# Altium PCB pcb.pcbdoc (part 4 of 6)
Units mm, origin at the board's own origin, x right, y up, seen from the top; angles counter-clockwise.
Board outline 95 x 60 mm, 4 copper layers (Top Layer, TopInt Layer, BotInt Layer, Bottom Layer), stack 1.459 mm thick; 162 components, 164 nets, 673 pads, 269 vias.
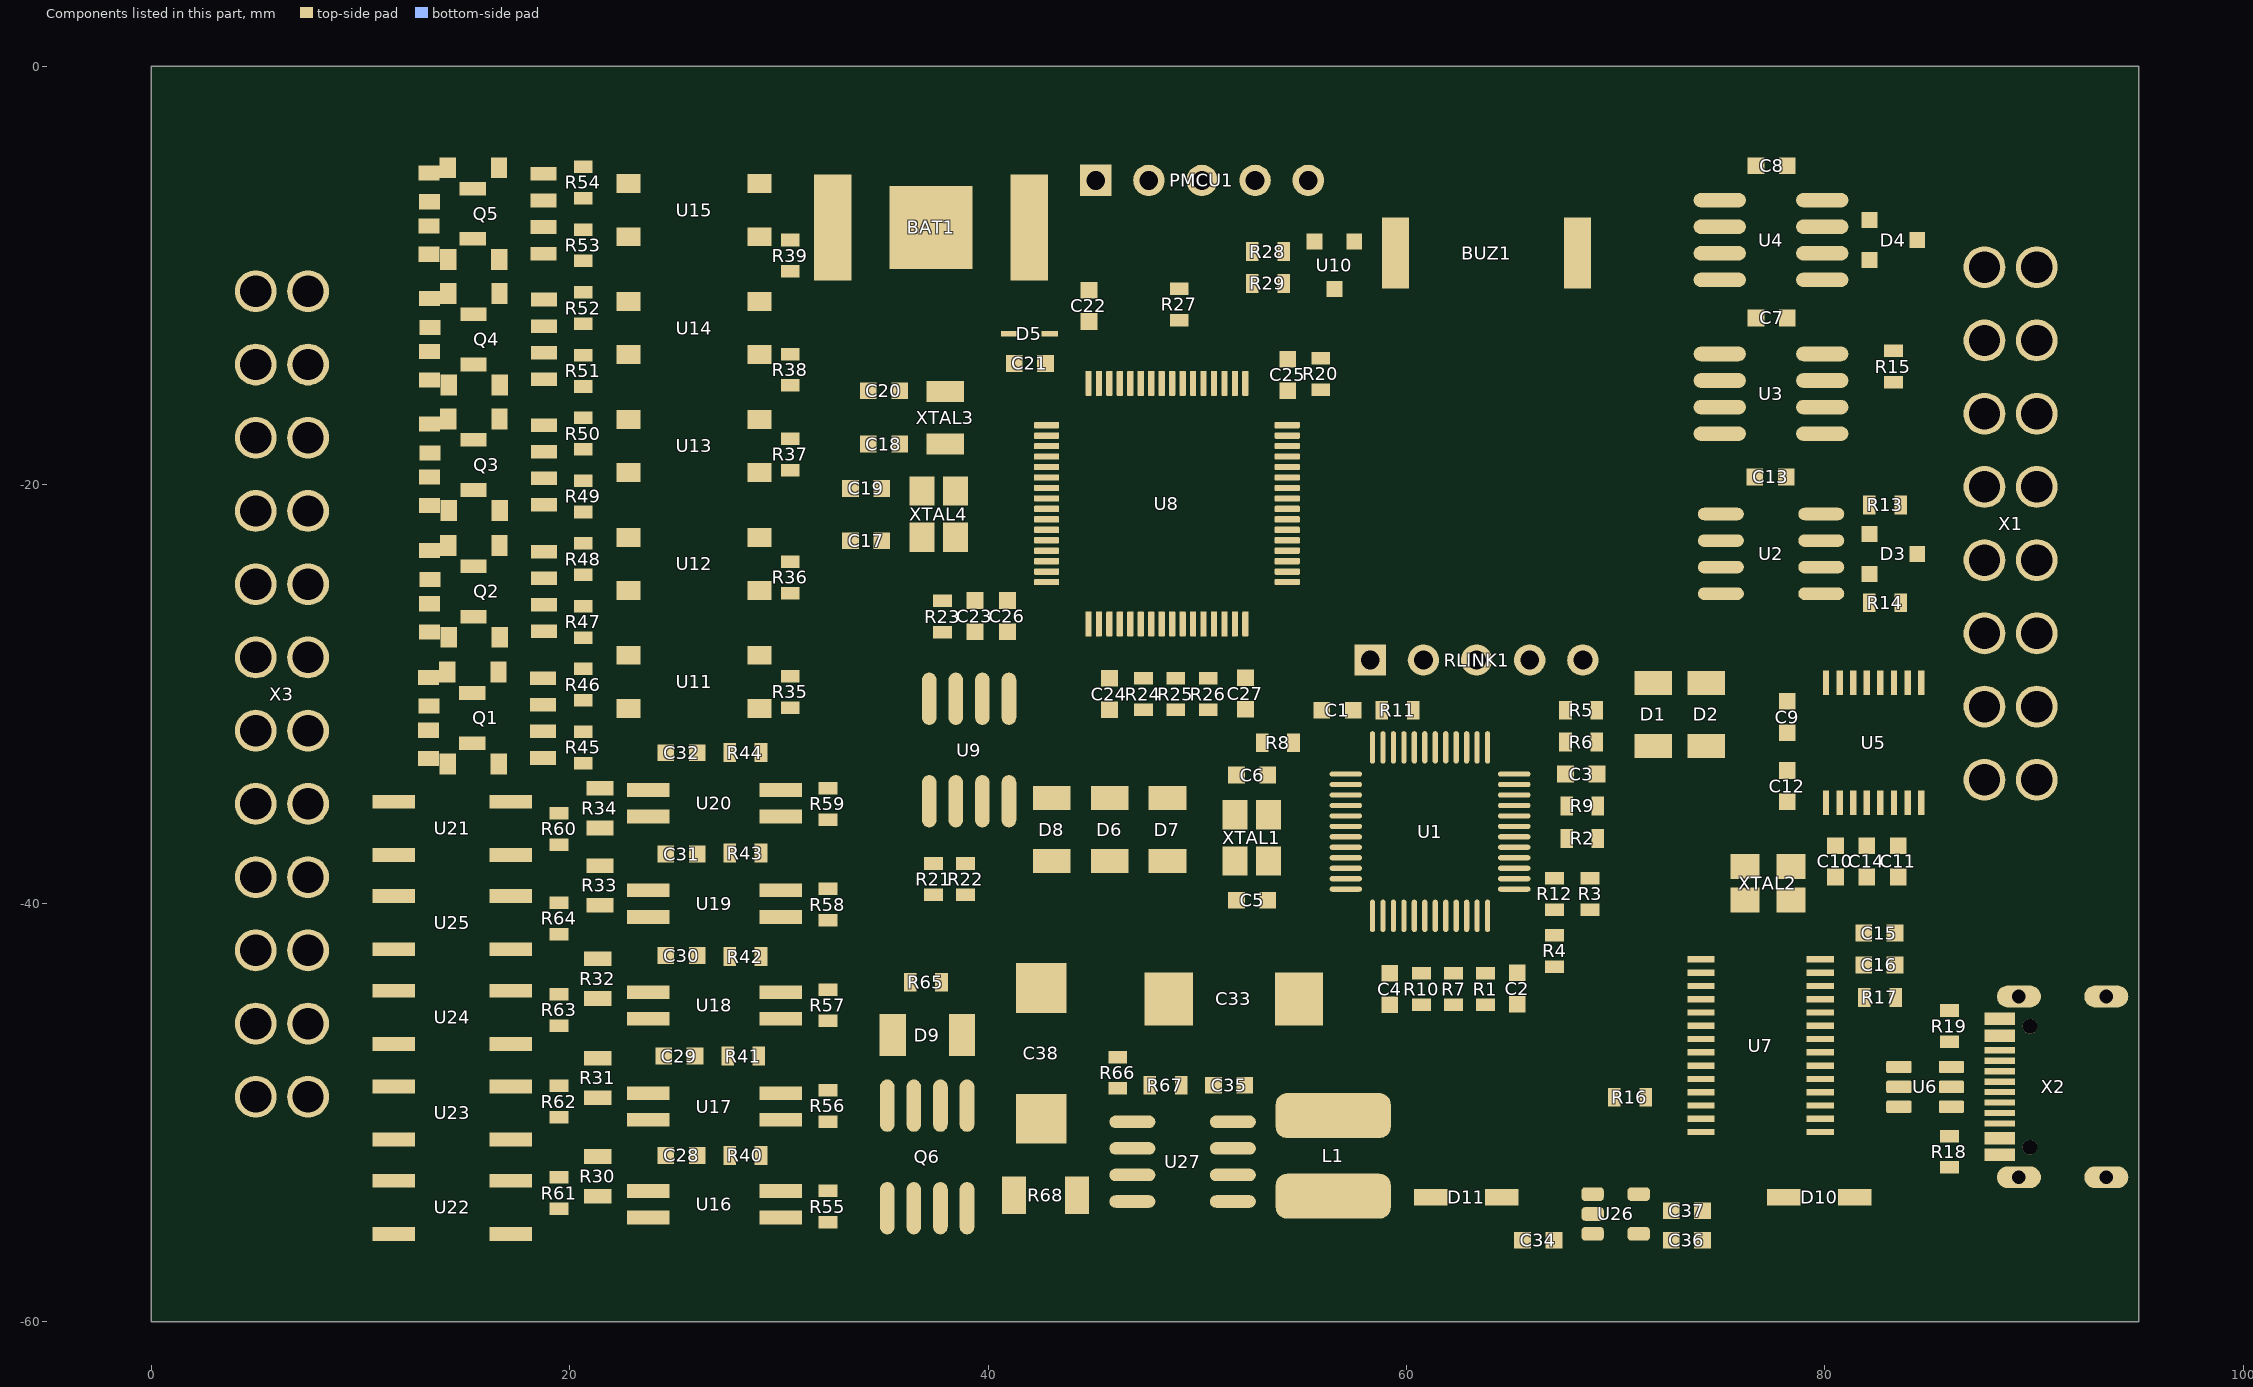
[diagram p6: the components of this part, seen from the top]

## Via types
v1: diameter 0.7, hole 0.3, Top Layer to Bottom Layer, tented both sides, 249 vias
v2: diameter 1, hole 0.5, Top Layer to Bottom Layer, tented both sides, 20 vias

## Nets (pads, with @x,y where several pads share a name; then routed paths per layer and width w, separated by ;. In a path a pad name is that pad's centre, name@x,y a point inside that pad or via, vN(x,y) a via of type N, cw(c..) or ccw(c..) an arc to the next point about the centre after c; other vN are vias at no path point) (continued)
copper on no net: (continued)
  Top Layer w0.025: 68.334,-20.15 68.512,-20.15 ; 68.334,-19.642 68.512,-19.642 ; 68.334,-19.617 68.512,-19.617 ; 68.334,-19.592 68.538,-19.592 ; 68.334,-18.245 68.639,-18.245 ; 68.334,-18.22 68.639,-18.22 ; 68.334,-18.195 68.487,-18.195 ; 68.36,-20.252 68.563,-20.252 ; 68.36,-20.227 68.538,-20.227 ; 68.36,-19.566 68.538,-19.566 ; 68.36,-19.541 68.563,-19.541 ; 68.36,-19.515 68.563,-19.515 ; 68.36,-18.322 68.614,-18.322 ; 68.36,-18.296 68.639,-18.296 ; 68.36,-18.271 68.639,-18.271 ; 68.385,-20.303 68.614,-20.303 ; 68.385,-20.277 68.588,-20.277 ; 68.385,-19.49 68.588,-19.49 ; 68.385,-18.398 68.588,-18.398 ; 68.385,-18.372 68.614,-18.372 ; 68.385,-18.347 68.614,-18.347 ; 68.411,-20.328 68.639,-20.328 ; 68.411,-19.465 68.614,-19.465 ; 68.411,-19.439 68.639,-19.439 ; 68.411,-18.474 68.588,-18.474 ; 68.411,-18.449 68.588,-18.449 ; 68.411,-18.423 68.588,-18.423 ; 68.436,-20.354 68.665,-20.354 ; 68.436,-19.414 68.69,-19.414 ; 68.461,-20.404 68.792,-20.404 ; 68.461,-20.379 68.715,-20.379 ; 68.461,-19.388 68.741,-19.388 ; 68.487,-19.363 68.817,-19.363 ; 68.512,-20.43 69.249,-20.43 ; 68.512,-19.338 69.249,-19.338 ; 68.512,-18.195 68.665,-18.195 ; 68.512,-18.169 68.665,-18.169 ; 68.512,-18.144 68.665,-18.144 ; 68.512,-18.118 68.69,-18.118 ; 68.538,-20.455 69.223,-20.455 ; 68.538,-19.312 69.223,-19.312 ; 68.538,-18.093 68.69,-18.093 ; 68.538,-18.068 68.69,-18.068 ; 68.538,-18.042 68.715,-18.042 ; 68.563,-20.481 69.198,-20.481 ; 68.563,-18.017 68.715,-18.017 ; 68.563,-17.991 68.715,-17.991 ; 68.563,-17.966 68.715,-17.966 ; 68.563,-17.941 68.741,-17.941 ; 68.588,-19.287 69.173,-19.287 ; 68.588,-17.915 68.741,-17.915 ; 68.588,-17.89 68.741,-17.89 ; 68.588,-17.864 68.766,-17.864 ; 68.588,-17.839 68.766,-17.839 ; 68.614,-20.506 69.147,-20.506 ; 68.614,-17.814 68.766,-17.814 ; 68.614,-17.788 68.766,-17.788 ; 68.614,-17.763 68.792,-17.763 ; 68.614,-17.737 68.792,-17.737 ; 68.639,-19.261 69.122,-19.261 ; 68.639,-17.712 68.792,-17.712 ; 68.639,-17.687 68.817,-17.687 ; 68.639,-17.661 68.817,-17.661 ; 68.665,-20.531 69.096,-20.531 ; 68.665,-17.636 68.817,-17.636 ; 68.665,-17.61 68.817,-17.61 ; 68.665,-17.585 68.842,-17.585 ; 68.665,-17.56 68.842,-17.56 ; 68.69,-19.236 69.071,-19.236 ; 68.69,-17.534 68.842,-17.534 ; 68.69,-17.509 68.868,-17.509 ; 68.69,-17.483 68.868,-17.483 ; 68.69,-17.458 68.868,-17.458 ; 68.69,-15.782 68.868,-15.782 ; 68.69,-15.756 68.868,-15.756 ; 68.69,-15.731 68.868,-15.731 ; 68.69,-15.705 68.868,-15.705 ; 68.69,-15.68 68.868,-15.68 ; 68.69,-15.655 68.868,-15.655 ; 68.69,-15.629 68.868,-15.629 ; 68.69,-15.604 68.868,-15.604 ; 68.69,-15.578 68.868,-15.578 ; 68.69,-15.553 68.868,-15.553 ; 68.69,-15.528 68.868,-15.528 ; 68.69,-15.502 68.868,-15.502 ; 68.69,-15.477 68.868,-15.477 ; 68.69,-15.451 68.868,-15.451 ; 68.69,-15.426 68.868,-15.426 ; 68.69,-15.401 68.868,-15.401 ; 68.715,-17.433 68.893,-17.433 ; 68.715,-17.407 68.893,-17.407 ; 68.715,-17.382 68.893,-17.382 ; 68.715,-17.356 68.893,-17.356 ; 68.715,-15.883 68.893,-15.883 ; 68.715,-15.858 68.893,-15.858 ; 68.715,-15.832 68.893,-15.832 ; 68.715,-15.807 68.868,-15.807 ; 68.715,-15.375 68.893,-15.375 ; 68.715,-15.35 68.893,-15.35 ; 68.715,-15.324 68.893,-15.324 ; 68.715,-15.299 68.919,-15.299 ; 68.741,-17.331 68.919,-17.331 ; 68.741,-17.306 68.919,-17.306 ; 68.741,-17.28 68.919,-17.28 ; 68.741,-15.934 68.919,-15.934 ; 68.741,-15.909 68.919,-15.909 ; 68.741,-15.274 68.919,-15.274 ; 68.741,-15.248 68.944,-15.248 ; 68.766,-20.557 68.969,-20.557 ; 68.766,-17.255 68.944,-17.255 ; 68.766,-17.229 68.944,-17.229 ; 68.766,-17.204 68.944,-17.204 ; 68.766,-15.985 68.969,-15.985 ; 68.766,-15.959 68.944,-15.959 ; 68.766,-15.223 68.944,-15.223 ; 68.766,-15.197 68.969,-15.197 ; 68.792,-16.036 69.02,-16.036 ; 68.792,-16.01 68.995,-16.01 ; 68.792,-15.172 68.995,-15.172 ; 68.792,-15.147 69.02,-15.147 ; 68.817,-16.061 69.046,-16.061 ; 68.817,-15.121 69.046,-15.121 ; 68.842,-16.112 69.147,-16.112 ; 68.842,-16.086 69.096,-16.086 ; 68.842,-15.096 69.096,-15.096 ; 68.868,-16.137 69.604,-16.137 ; 68.868,-15.07 69.173,-15.07 ; 68.893,-15.045 69.604,-15.045 ; 68.919,-16.163 69.579,-16.163 ; 68.919,-15.02 69.579,-15.02 ; 68.944,-19.363 69.274,-19.363 ; 68.944,-16.188 69.554,-16.188 ; 68.944,-14.994 69.554,-14.994 ; 68.969,-20.404 69.274,-20.404 ; 68.995,-16.213 69.503,-16.213 ; 68.995,-14.969 69.503,-14.969 ; 69.02,-19.388 69.3,-19.388 ; 69.046,-20.379 69.3,-20.379 ; 69.046,-16.239 69.427,-16.239 ; 69.046,-14.943 69.452,-14.943 ; 69.071,-19.414 69.325,-19.414 ; 69.096,-20.354 69.325,-20.354 ; 69.122,-20.328 69.35,-20.328 ; 69.122,-19.439 69.35,-19.439 ; 69.122,-18.245 69.325,-18.245 ; 69.122,-18.22 69.3,-18.22 ; 69.122,-18.195 69.3,-18.195 ; 69.122,-18.169 69.3,-18.169 ; 69.122,-18.144 69.3,-18.144 ; 69.122,-18.118 69.3,-18.118 ; 69.122,-18.093 69.3,-18.093 ; 69.122,-18.068 69.3,-18.068 ; 69.122,-18.042 69.3,-18.042 ; 69.147,-20.303 69.376,-20.303 ; 69.147,-19.465 69.35,-19.465 ; 69.147,-18.322 69.401,-18.322 ; 69.147,-18.296 69.376,-18.296 ; 69.147,-18.271 69.35,-18.271 ; 69.147,-18.017 69.325,-18.017 ; 69.147,-17.991 69.35,-17.991 ; 69.147,-17.966 69.376,-17.966 ; 69.147,-17.56 69.325,-17.56 ; 69.147,-17.534 69.325,-17.534 ; 69.147,-17.509 69.325,-17.509 ; 69.147,-17.483 69.325,-17.483 ; 69.173,-20.277 69.376,-20.277 ; 69.173,-19.515 69.376,-19.515 ; 69.173,-19.49 69.376,-19.49 ; 69.173,-18.347 69.452,-18.347 ; 69.173,-17.941 69.401,-17.941 ; 69.173,-17.458 69.35,-17.458 ; 69.173,-17.433 69.376,-17.433 ; 69.173,-17.407 69.401,-17.407 ; 69.173,-16.264 69.325,-16.264 ; 69.198,-20.252 69.401,-20.252 ; 69.198,-20.227 69.401,-20.227 ; 69.198,-19.541 69.401,-19.541 ; 69.198,-18.372 69.935,-18.372 ; 69.198,-17.915 69.452,-17.915 ; 69.198,-17.382 69.427,-17.382 ; 69.198,-14.918 69.3,-14.918 ; 69.223,-20.201 69.401,-20.201 ; 69.223,-19.592 69.427,-19.592 ; 69.223,-19.566 69.401,-19.566 ; 69.223,-18.398 69.909,-18.398 ; 69.223,-17.89 69.528,-17.89 ; 69.223,-17.356 69.452,-17.356 ; 69.249,-20.176 69.427,-20.176 ; 69.249,-20.15 69.427,-20.15 ; 69.249,-20.125 69.427,-20.125 ; 69.249,-19.642 69.427,-19.642 ; 69.249,-19.617 69.427,-19.617 ; 69.249,-18.423 69.884,-18.423 ; 69.249,-17.864 69.655,-17.864 ; 69.249,-17.331 69.528,-17.331 ; 69.274,-20.1 69.452,-20.1 ; 69.274,-20.074 69.452,-20.074 ; 69.274,-20.049 69.452,-20.049 ; 69.274,-20.023 69.452,-20.023 ; 69.274,-19.744 69.452,-19.744 ; 69.274,-19.719 69.452,-19.719 ; 69.274,-19.693 69.452,-19.693 ; 69.274,-19.668 69.452,-19.668 ; 69.274,-18.449 69.833,-18.449 ; 69.274,-17.839 70.138,-17.839 ; 69.274,-17.306 70.036,-17.306 ; 69.3,-19.998 69.452,-19.998 ; 69.3,-19.973 69.452,-19.973 ; 69.3,-19.947 69.452,-19.947 ; 69.3,-19.922 69.452,-19.922 ; 69.3,-19.896 69.452,-19.896 ; 69.3,-19.871 69.452,-19.871 ; 69.3,-19.846 69.452,-19.846 ; 69.3,-19.82 69.452,-19.82 ; 69.3,-19.795 69.452,-19.795 ; 69.3,-19.769 69.452,-19.769 ; 69.3,-17.814 70.138,-17.814 ; 69.3,-17.28 70.011,-17.28 ; 69.325,-18.474 69.782,-18.474 ; 69.325,-17.255 69.985,-17.255 ; 69.325,-15.07 69.63,-15.07 ; 69.35,-17.788 70.138,-17.788 ; 69.35,-16.112 69.63,-16.112 ; 69.376,-18.499 69.706,-18.499 ; 69.376,-17.229 69.935,-17.229 ; 69.401,-16.086 69.655,-16.086 ; 69.401,-15.096 69.655,-15.096 ; 69.427,-17.763 70.138,-17.763 ; 69.427,-17.204 69.884,-17.204 ; 69.452,-16.061 69.681,-16.061 ; 69.452,-15.121 69.681,-15.121 ; 69.477,-16.036 69.706,-16.036 ; 69.477,-15.147 69.681,-15.147 ; 69.503,-16.01 69.706,-16.01 ; 69.503,-15.172 69.706,-15.172 ; 69.528,-17.179 69.782,-17.179 ; 69.528,-15.985 69.731,-15.985 ; 69.528,-15.223 69.731,-15.223 ; 69.528,-15.197 69.706,-15.197 ; 69.554,-17.737 70.138,-17.737 ; 69.554,-15.959 69.731,-15.959 ; 69.554,-15.934 69.731,-15.934 ; 69.554,-15.274 69.731,-15.274 ; 69.554,-15.248 69.731,-15.248 ; 69.579,-15.909 69.757,-15.909 ; 69.579,-15.883 69.757,-15.883 ; 69.579,-15.858 69.757,-15.858 ; 69.579,-15.832 69.757,-15.832 ; 69.579,-15.375 69.757,-15.375 ; 69.579,-15.35 69.757,-15.35 ; 69.579,-15.324 69.757,-15.324 ; 69.579,-15.299 69.757,-15.299 ; 69.706,-18.347 70.138,-18.347 ; 69.731,-20.531 69.884,-20.531 ; 69.731,-20.506 69.884,-20.506 ; 69.731,-20.481 69.884,-20.481 ; 69.731,-20.455 69.884,-20.455 ; 69.731,-20.43 69.884,-20.43 ; 69.731,-20.404 69.884,-20.404 ; 69.731,-20.379 69.884,-20.379 ; 69.731,-20.354 69.884,-20.354 ; 69.731,-20.328 69.884,-20.328 ; 69.731,-20.303 69.884,-20.303 ; 69.731,-20.277 69.884,-20.277 ; 69.731,-20.252 69.884,-20.252 ; 69.731,-20.227 69.884,-20.227 ; 69.731,-20.201 69.884,-20.201 ; 69.731,-20.176 69.884,-20.176 ; 69.731,-20.15 69.884,-20.15 ; 69.731,-20.125 69.884,-20.125 ; 69.731,-20.1 69.884,-20.1 ; 69.731,-20.074 69.884,-20.074 ; 69.731,-20.049 69.884,-20.049 ; 69.731,-20.023 69.884,-20.023 ; 69.731,-19.998 69.884,-19.998 ; 69.731,-19.973 69.884,-19.973 ; 69.731,-19.947 69.884,-19.947 ; 69.731,-19.922 69.884,-19.922 ; 69.731,-19.896 69.884,-19.896 ; 69.731,-19.871 69.884,-19.871 ; 69.731,-19.846 69.884,-19.846 ; 69.731,-19.82 69.884,-19.82 ; 69.731,-19.795 69.884,-19.795 ; 69.731,-19.769 69.884,-19.769 ; 69.731,-19.744 69.884,-19.744 ; 69.731,-19.719 69.884,-19.719 ; 69.731,-19.693 69.884,-19.693 ; 69.731,-19.668 69.884,-19.668 ; 69.731,-19.642 69.909,-19.642 ; 69.731,-19.617 69.909,-19.617 ; 69.731,-19.592 69.935,-19.592 ; 69.731,-19.566 69.935,-19.566 ; 69.731,-19.541 69.96,-19.541 ; 69.731,-19.515 69.985,-19.515 ; 69.731,-19.49 69.985,-19.49 ; 69.731,-19.465 70.011,-19.465 ; 69.731,-19.439 70.036,-19.439 ; 69.731,-19.414 70.087,-19.414 ; 69.731,-19.388 69.884,-19.388 ; 69.731,-19.363 69.884,-19.363 ; 69.731,-19.338 69.884,-19.338 ; 69.731,-19.312 69.884,-19.312 ; 69.731,-19.287 69.884,-19.287 ; 69.731,-19.261 69.884,-19.261 ; 69.731,-19.236 69.884,-19.236 ; 69.757,-18.322 70.138,-18.322 ; 69.782,-17.331 70.062,-17.331 ; 69.808,-18.296 70.138,-18.296 ; 69.833,-18.271 70.138,-18.271 ; 69.833,-17.356 70.062,-17.356 ; 69.858,-17.382 70.087,-17.382 ; 69.884,-18.245 70.138,-18.245 ; 69.909,-19.388 70.138,-19.388 ; 69.909,-18.22 70.138,-18.22 ; 69.909,-18.195 70.138,-18.195 ; 69.909,-17.433 70.112,-17.433 ; 69.909,-17.407 70.087,-17.407 ; 69.935,-19.363 70.214,-19.363 ; 69.935,-18.169 70.138,-18.169 ; 69.935,-17.483 70.112,-17.483 ; 69.935,-17.458 70.112,-17.458 ; 69.935,-15.909 70.112,-15.909 ; 69.935,-15.883 70.112,-15.883 ; 69.96,-19.338 70.62,-19.338 ; 69.96,-18.372 70.138,-18.372 ; 69.96,-18.144 70.138,-18.144 ; 69.96,-18.118 70.138,-18.118 ; 69.96,-18.093 70.138,-18.093 ; 69.96,-18.068 70.138,-18.068 ; 69.96,-18.042 70.138,-18.042 ; 69.96,-18.017 70.138,-18.017 ; 69.96,-17.991 70.138,-17.991 ; 69.96,-17.966 70.138,-17.966 ; 69.96,-17.941 70.138,-17.941 ; 69.96,-17.915 70.138,-17.915 ; 69.96,-17.89 70.138,-17.89 ; 69.96,-17.864 70.138,-17.864 ; 69.96,-17.712 70.138,-17.712 ; 69.96,-17.687 70.138,-17.687 ; 69.96,-17.661 70.138,-17.661 ; 69.96,-17.636 70.138,-17.636 ; 69.96,-17.61 70.138,-17.61 ; 69.96,-17.585 70.138,-17.585 ; 69.96,-17.56 70.138,-17.56 ; 69.96,-17.534 70.138,-17.534 ; 69.96,-17.509 70.138,-17.509 ; 69.96,-16.01 70.163,-16.01 ; 69.96,-15.985 70.163,-15.985 ; 69.96,-15.959 70.138,-15.959 ; 69.96,-15.934 70.138,-15.934 ; 69.985,-19.312 70.595,-19.312 ; 69.985,-18.474 70.163,-18.474 ; 69.985,-18.449 70.163,-18.449 ; 69.985,-18.423 70.163,-18.423 ; 69.985,-18.398 70.163,-18.398 ; 69.985,-16.061 70.239,-16.061 ; 69.985,-16.036 70.189,-16.036 ; 69.985,-15.375 70.189,-15.375 ; 69.985,-15.35 70.163,-15.35 ; 69.985,-15.324 70.163,-15.324 ; 69.985,-15.299 70.163,-15.299 ; 69.985,-15.274 70.163,-15.274 ; 69.985,-15.248 70.163,-15.248 ; 69.985,-15.223 70.163,-15.223 ; 69.985,-15.197 70.163,-15.197 ; 70.011,-16.086 70.265,-16.086 ; 70.011,-15.426 70.239,-15.426 ; 70.011,-15.401 70.214,-15.401 ; 70.011,-15.172 70.189,-15.172 ; 70.011,-15.147 70.214,-15.147 ; 70.011,-15.121 70.239,-15.121 ; 70.036,-19.287 70.57,-19.287 ; 70.036,-16.112 70.366,-16.112 ; 70.036,-15.451 70.316,-15.451 ; 70.036,-15.096 70.29,-15.096 ; 70.062,-19.261 70.544,-19.261 ; 70.062,-16.137 70.849,-16.137 ; 70.062,-15.477 70.366,-15.477 ; 70.062,-15.07 70.366,-15.07 ; 70.087,-16.163 70.824,-16.163 ; 70.087,-15.502 70.468,-15.502 ; 70.087,-15.045 70.824,-15.045 ; 70.112,-16.188 70.798,-16.188 ; 70.112,-15.528 70.57,-15.528 ; 70.112,-15.02 70.798,-15.02 ; 70.138,-19.236 70.468,-19.236 ; 70.138,-15.553 70.646,-15.553 ; 70.138,-14.994 70.773,-14.994 ; 70.163,-16.213 70.747,-16.213 ; 70.189,-15.578 70.722,-15.578 ; 70.189,-14.969 70.722,-14.969 ; 70.239,-16.239 70.671,-16.239 ; 70.239,-14.943 70.646,-14.943 ; 70.265,-15.604 70.773,-15.604 ; 70.316,-19.363 70.646,-19.363 ; 70.341,-15.629 70.798,-15.629 ; 70.366,-16.264 70.544,-16.264 ; 70.392,-14.918 70.519,-14.918 ; 70.417,-19.388 70.671,-19.388 ; 70.443,-19.414 70.671,-19.414 ; 70.468,-19.439 70.671,-19.439 ; 70.468,-15.655 70.849,-15.655 ; 70.493,-19.465 70.697,-19.465 ; 70.493,-18.474 70.646,-18.474 ; 70.493,-18.449 70.646,-18.449 ; 70.493,-18.423 70.646,-18.423 ; 70.493,-18.398 70.646,-18.398 ; 70.493,-18.372 70.646,-18.372 ; 70.493,-18.347 70.646,-18.347 ; 70.493,-18.322 70.646,-18.322 ; 70.493,-18.296 70.646,-18.296 ; 70.493,-18.271 70.646,-18.271 ; 70.493,-18.245 70.646,-18.245 ; 70.493,-18.22 70.646,-18.22 ; 70.493,-18.195 70.646,-18.195 ; 70.493,-18.169 70.646,-18.169 ; 70.493,-18.144 70.646,-18.144 ; 70.493,-18.118 70.646,-18.118 ; 70.493,-18.093 70.646,-18.093 ; 70.493,-18.068 70.646,-18.068 ; 70.493,-18.042 70.646,-18.042 ; 70.493,-18.017 70.646,-18.017 ; 70.493,-17.991 70.646,-17.991 ; 70.493,-17.966 70.646,-17.966 ; 70.493,-17.941 70.646,-17.941 ; 70.493,-17.915 70.646,-17.915 ; 70.493,-17.89 70.646,-17.89 ; 70.493,-17.864 70.646,-17.864 ; 70.493,-17.839 70.646,-17.839 ; 70.493,-17.814 70.646,-17.814 ; 70.493,-17.788 70.646,-17.788 ; 70.493,-17.763 70.646,-17.763 ; 70.493,-17.737 70.646,-17.737 ; 70.493,-17.712 70.646,-17.712 ; 70.493,-17.687 70.646,-17.687 ; 70.493,-17.661 70.646,-17.661 ; 70.493,-17.636 70.646,-17.636 ; 70.493,-17.61 70.646,-17.61 ; 70.493,-17.585 70.671,-17.585 ; 70.493,-17.56 70.671,-17.56 ; 70.493,-17.534 70.671,-17.534 ; 70.493,-17.509 70.697,-17.509 ; 70.493,-17.483 70.697,-17.483 ; 70.493,-17.458 70.722,-17.458 ; 70.493,-17.433 70.747,-17.433 ; 70.493,-17.407 70.773,-17.407 ; 70.493,-17.382 70.798,-17.382 ; 70.493,-17.356 70.849,-17.356 ; 70.493,-17.331 70.646,-17.331 ; 70.493,-17.306 70.646,-17.306 ; 70.493,-17.28 70.646,-17.28 ; 70.493,-17.255 70.646,-17.255 ; 70.493,-17.229 70.646,-17.229 ; 70.493,-17.204 70.646,-17.204 ; 70.519,-19.541 70.697,-19.541 ; 70.519,-19.515 70.697,-19.515 ; 70.519,-19.49 70.697,-19.49 ; 70.519,-15.07 70.849,-15.07 ; 70.544,-20.531 70.722,-20.531 ; 70.544,-20.506 70.722,-20.506 ; 70.544,-20.481 70.722,-20.481 ; 70.544,-20.455 70.722,-20.455 ; 70.544,-20.43 70.722,-20.43 ; 70.544,-20.404 70.722,-20.404 ; 70.544,-20.379 70.722,-20.379 ; 70.544,-20.354 70.722,-20.354 ; 70.544,-20.328 70.722,-20.328 ; 70.544,-20.303 70.722,-20.303 ; 70.544,-20.277 70.722,-20.277 ; 70.544,-20.252 70.722,-20.252 ; 70.544,-20.227 70.722,-20.227 ; 70.544,-20.201 70.722,-20.201 ; 70.544,-20.176 70.722,-20.176 ; 70.544,-20.15 70.722,-20.15 ; 70.544,-20.125 70.722,-20.125 ; 70.544,-20.1 70.722,-20.1 ; 70.544,-20.074 70.722,-20.074 ; 70.544,-20.049 70.722,-20.049 ; 70.544,-20.023 70.722,-20.023 ; 70.544,-19.998 70.722,-19.998 ; 70.544,-19.973 70.722,-19.973 ; 70.544,-19.947 70.722,-19.947 ; 70.544,-19.922 70.722,-19.922 ; 70.544,-19.896 70.722,-19.896 ; 70.544,-19.871 70.722,-19.871 ; 70.544,-19.846 70.722,-19.846 ; 70.544,-19.82 70.722,-19.82 ; 70.544,-19.795 70.722,-19.795 ; 70.544,-19.769 70.722,-19.769 ; 70.544,-19.744 70.722,-19.744 ; 70.544,-19.719 70.722,-19.719 ; 70.544,-19.693 70.722,-19.693 ; 70.544,-19.668 70.722,-19.668 ; 70.544,-19.642 70.722,-19.642 ; 70.544,-19.617 70.722,-19.617 ; 70.544,-19.592 70.722,-19.592 ; 70.544,-19.566 70.722,-19.566 ; 70.544,-15.68 70.874,-15.68 ; 70.57,-16.112 70.874,-16.112 ; 70.595,-15.096 70.874,-15.096 ; 70.62,-15.705 70.9,-15.705 ; 70.646,-16.086 70.9,-16.086 ; 70.646,-15.121 70.9,-15.121 ; 70.671,-17.331 70.951,-17.331 ; 70.671,-17.306 71.103,-17.306 ; 70.671,-16.061 70.9,-16.061 ; 70.671,-15.731 70.9,-15.731 ; 70.697,-17.28 71.103,-17.28 ; 70.697,-15.756 70.925,-15.756 ; 70.697,-15.147 70.9,-15.147 ; 70.722,-17.255 71.103,-17.255 ; 70.722,-16.036 70.925,-16.036 ; 70.722,-15.782 70.925,-15.782 ; 70.722,-15.197 70.925,-15.197 ; 70.722,-15.172 70.925,-15.172 ; 70.747,-16.01 70.925,-16.01 ; 70.747,-15.985 70.925,-15.985 ; 70.747,-15.832 70.951,-15.832 ; 70.747,-15.807 70.925,-15.807 ; 70.747,-15.248 70.925,-15.248 ; 70.747,-15.223 70.925,-15.223 ; 70.773,-17.229 71.103,-17.229 ; 70.773,-15.959 70.951,-15.959 ; 70.773,-15.934 70.951,-15.934 ; 70.773,-15.909 70.951,-15.909 ; 70.773,-15.883 70.951,-15.883 ; 70.773,-15.858 70.951,-15.858 ; 70.773,-15.299 70.925,-15.299 ; 70.773,-15.274 70.925,-15.274 ; 70.798,-17.204 71.103,-17.204 ; 70.874,-17.179 71.103,-17.179 ; 71.001,-20.277 71.205,-20.277 ; 71.001,-20.252 71.179,-20.252 ; 71.001,-20.227 71.179,-20.227 ; 71.001,-20.201 71.179,-20.201 ; 71.001,-20.176 71.154,-20.176 ; 71.027,-20.328 71.23,-20.328 ; 71.027,-20.303 71.205,-20.303 ; 71.027,-19.617 71.205,-19.617 ; 71.027,-19.592 71.205,-19.592 ; 71.027,-19.566 71.205,-19.566 ; 71.027,-19.541 71.205,-19.541 ; 71.027,-19.515 71.205,-19.515 ; 71.027,-17.331 71.103,-17.331 ; 71.052,-20.379 71.306,-20.379 ; 71.052,-20.354 71.281,-20.354 ; 71.052,-19.719 71.306,-19.719 ; 71.052,-19.693 71.255,-19.693 ; 71.052,-19.668 71.23,-19.668 ; 71.052,-19.642 71.23,-19.642 ; 71.052,-19.49 71.23,-19.49 ; 71.052,-19.465 71.23,-19.465 ; 71.052,-19.439 71.255,-19.439 ; 71.078,-20.404 71.382,-20.404 ; 71.078,-19.744 71.357,-19.744 ; 71.078,-19.414 71.306,-19.414 ; 71.078,-19.388 71.332,-19.388 ; 71.103,-20.43 71.89,-20.43 ; 71.103,-19.769 71.408,-19.769 ; 71.103,-19.363 71.433,-19.363 ; 71.128,-20.455 71.865,-20.455 ; 71.128,-19.795 71.509,-19.795 ; 71.128,-19.338 71.89,-19.338 ; 71.154,-19.82 71.611,-19.82 ; 71.154,-19.312 71.84,-19.312 ; 71.179,-20.481 71.84,-20.481 ; 71.179,-19.846 71.687,-19.846 ; 71.205,-20.506 71.789,-20.506 ; 71.205,-19.287 71.814,-19.287 ; 71.205,-18.068 71.382,-18.068 ; 71.205,-18.042 71.382,-18.042 ; 71.205,-18.017 71.382,-18.017 ; 71.205,-17.991 71.382,-17.991 ; 71.205,-17.966 71.357,-17.966 ; 71.205,-17.941 71.357,-17.941 ; 71.205,-17.915 71.357,-17.915 ; 71.205,-17.89 71.357,-17.89 ; 71.205,-17.864 72.271,-17.864 ; 71.205,-17.839 72.271,-17.839 ; 71.205,-17.814 72.271,-17.814 ; 71.205,-17.788 72.271,-17.788 ; 71.205,-17.763 72.271,-17.763 ; 71.205,-17.737 72.271,-17.737 ; 71.205,-17.712 71.382,-17.712 ; 71.205,-17.687 71.382,-17.687 ; 71.205,-17.661 71.382,-17.661 ; 71.205,-17.636 71.382,-17.636 ; 71.23,-19.871 71.763,-19.871 ; 71.23,-19.261 71.763,-19.261 ; 71.23,-18.144 71.433,-18.144 ; 71.23,-18.118 71.408,-18.118 ; 71.23,-18.093 71.408,-18.093 ; 71.23,-17.61 71.408,-17.61 ; 71.23,-17.585 71.408,-17.585 ; 71.23,-17.56 71.408,-17.56 ; 71.255,-18.195 71.459,-18.195 ; 71.255,-18.169 71.433,-18.169 ; 71.255,-17.534 71.433,-17.534 ; 71.255,-17.509 71.433,-17.509 ; 71.281,-20.531 71.738,-20.531 ; 71.281,-18.245 71.509,-18.245 ; 71.281,-18.22 71.484,-18.22 ; 71.281,-17.483 71.459,-17.483 ; 71.281,-17.458 71.484,-17.458 ; 71.306,-19.896 71.814,-19.896 ; 71.306,-19.236 71.687,-19.236 ; 71.306,-18.271 71.535,-18.271 ; 71.306,-17.433 71.509,-17.433 ; 71.306,-17.407 71.535,-17.407 ; 71.332,-18.322 71.586,-18.322 ; 71.332,-18.296 71.56,-18.296 ; 71.332,-17.382 71.56,-17.382 ; 71.357,-18.347 71.636,-18.347 ; 71.357,-17.356 71.586,-17.356 ; 71.382,-20.557 71.611,-20.557 ; 71.382,-19.922 71.865,-19.922 ; 71.382,-18.372 71.763,-18.372 ; 71.382,-17.331 71.662,-17.331 ; 71.408,-18.398 72.144,-18.398 ; 71.408,-17.306 72.119,-17.306 ; 71.433,-17.28 72.094,-17.28 ; 71.459,-18.423 72.119,-18.423 ; 71.459,-17.255 72.068,-17.255 ; 71.484,-19.947 71.89,-19.947 ; 71.484,-18.449 72.094,-18.449 ; 71.509,-17.229 72.017,-17.229 ; 71.535,-18.474 72.043,-18.474 ; 71.56,-19.363 71.89,-19.363 ; 71.56,-17.204 71.967,-17.204 ; 71.586,-19.973 71.916,-19.973 ; 71.611,-20.404 71.916,-20.404 ; 71.611,-18.499 71.967,-18.499 ; 71.636,-17.179 71.89,-17.179 ; 71.662,-19.998 71.941,-19.998 ; 71.662,-19.388 71.916,-19.388 ; 71.687,-20.379 71.941,-20.379 ; 71.687,-19.414 71.941,-19.414 ; 71.713,-20.023 71.941,-20.023 ; 71.738,-20.354 71.967,-20.354 ; 71.738,-20.049 71.967,-20.049 ; 71.738,-19.439 71.941,-19.439 ; 71.763,-20.328 71.967,-20.328 ; 71.763,-20.074 71.967,-20.074 ; 71.763,-19.465 71.967,-19.465 ; 71.789,-20.303 71.967,-20.303 ; 71.789,-20.1 71.992,-20.1 ; 71.789,-19.515 71.967,-19.515 ; 71.789,-19.49 71.967,-19.49 ; 71.814,-20.277 71.992,-20.277 ; 71.814,-20.252 71.992,-20.252 ; 71.814,-20.227 71.992,-20.227 ; 71.814,-20.201 71.992,-20.201 ; 71.814,-20.176 71.992,-20.176 ; 71.814,-20.15 71.992,-20.15 ; 71.814,-20.125 71.992,-20.125 ; 71.814,-19.617 71.992,-19.617 ; 71.814,-19.592 71.992,-19.592 ; 71.814,-19.566 71.992,-19.566 ; 71.814,-19.541 71.992,-19.541 ; 71.814,-18.372 72.17,-18.372 ; 71.865,-17.331 72.144,-17.331 ; 71.916,-17.356 72.17,-17.356 ; 71.941,-18.347 72.195,-18.347 ; 71.967,-17.382 72.17,-17.382 ; 71.992,-18.322 72.221,-18.322 ; 71.992,-17.407 72.195,-17.407 ; 72.017,-17.458 72.221,-17.458 ; 72.017,-17.433 72.221,-17.433 ; 72.043,-18.296 72.246,-18.296 ; 72.043,-17.483 72.221,-17.483 ; 72.068,-18.271 72.246,-18.271 ; 72.068,-17.56 72.246,-17.56 ; 72.068,-17.534 72.246,-17.534 ; 72.068,-17.509 72.246,-17.509 ; 72.094,-18.245 72.221,-18.245 ; 72.094,-17.687 72.271,-17.687 ; 72.094,-17.661 72.271,-17.661 ; 72.094,-17.636 72.271,-17.636 ; 72.094,-17.61 72.271,-17.61 ; 72.094,-17.585 72.246,-17.585 ; 72.119,-18.22 72.195,-18.22 ; 72.119,-17.712 72.271,-17.712 ; 64.753,-14.486 64.905,-14.486 64.753,-14.486